# Altium PCB mergedPCBs.PcbDoc (part 1 of 4)
Units mil, origin at the board's own origin, x right, y up, seen from the top; angles counter-clockwise.
Board outline 7880 x 8510 mil, 2 copper layers (Top Layer, Bottom Layer); 381 components, 0 nets, 1142 pads, 205 vias.
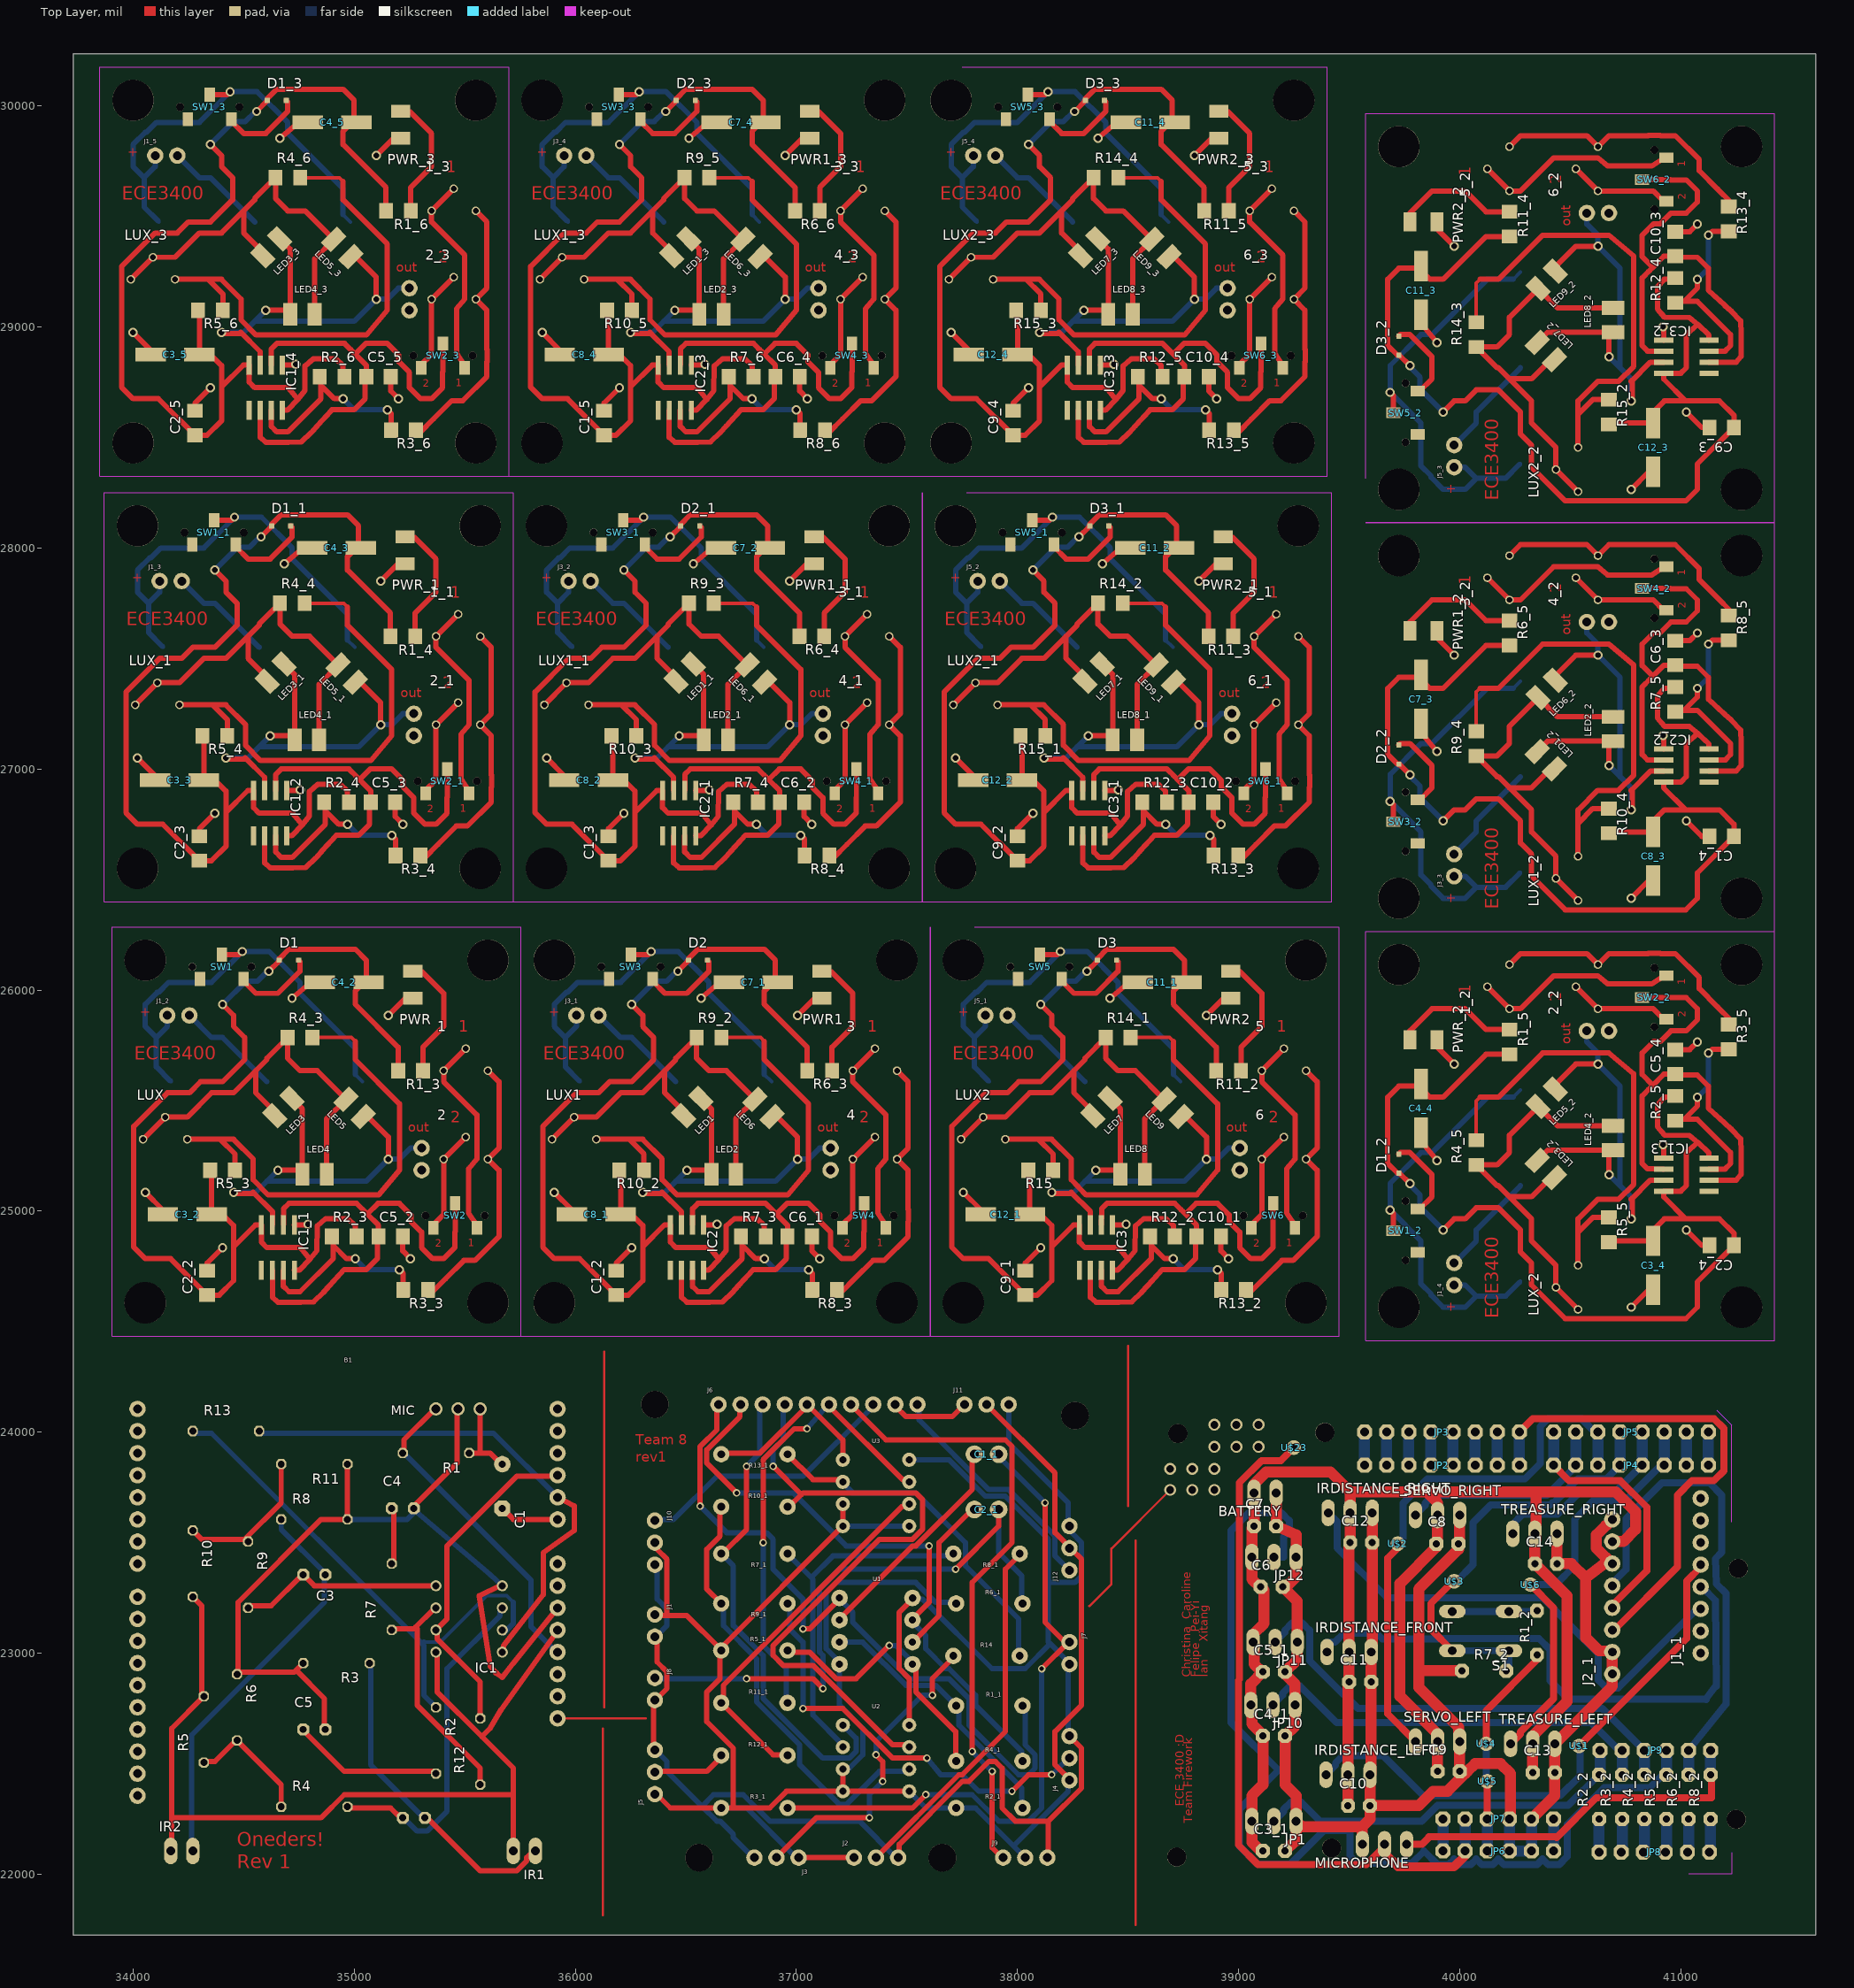
[diagram p0: Top Layer view]
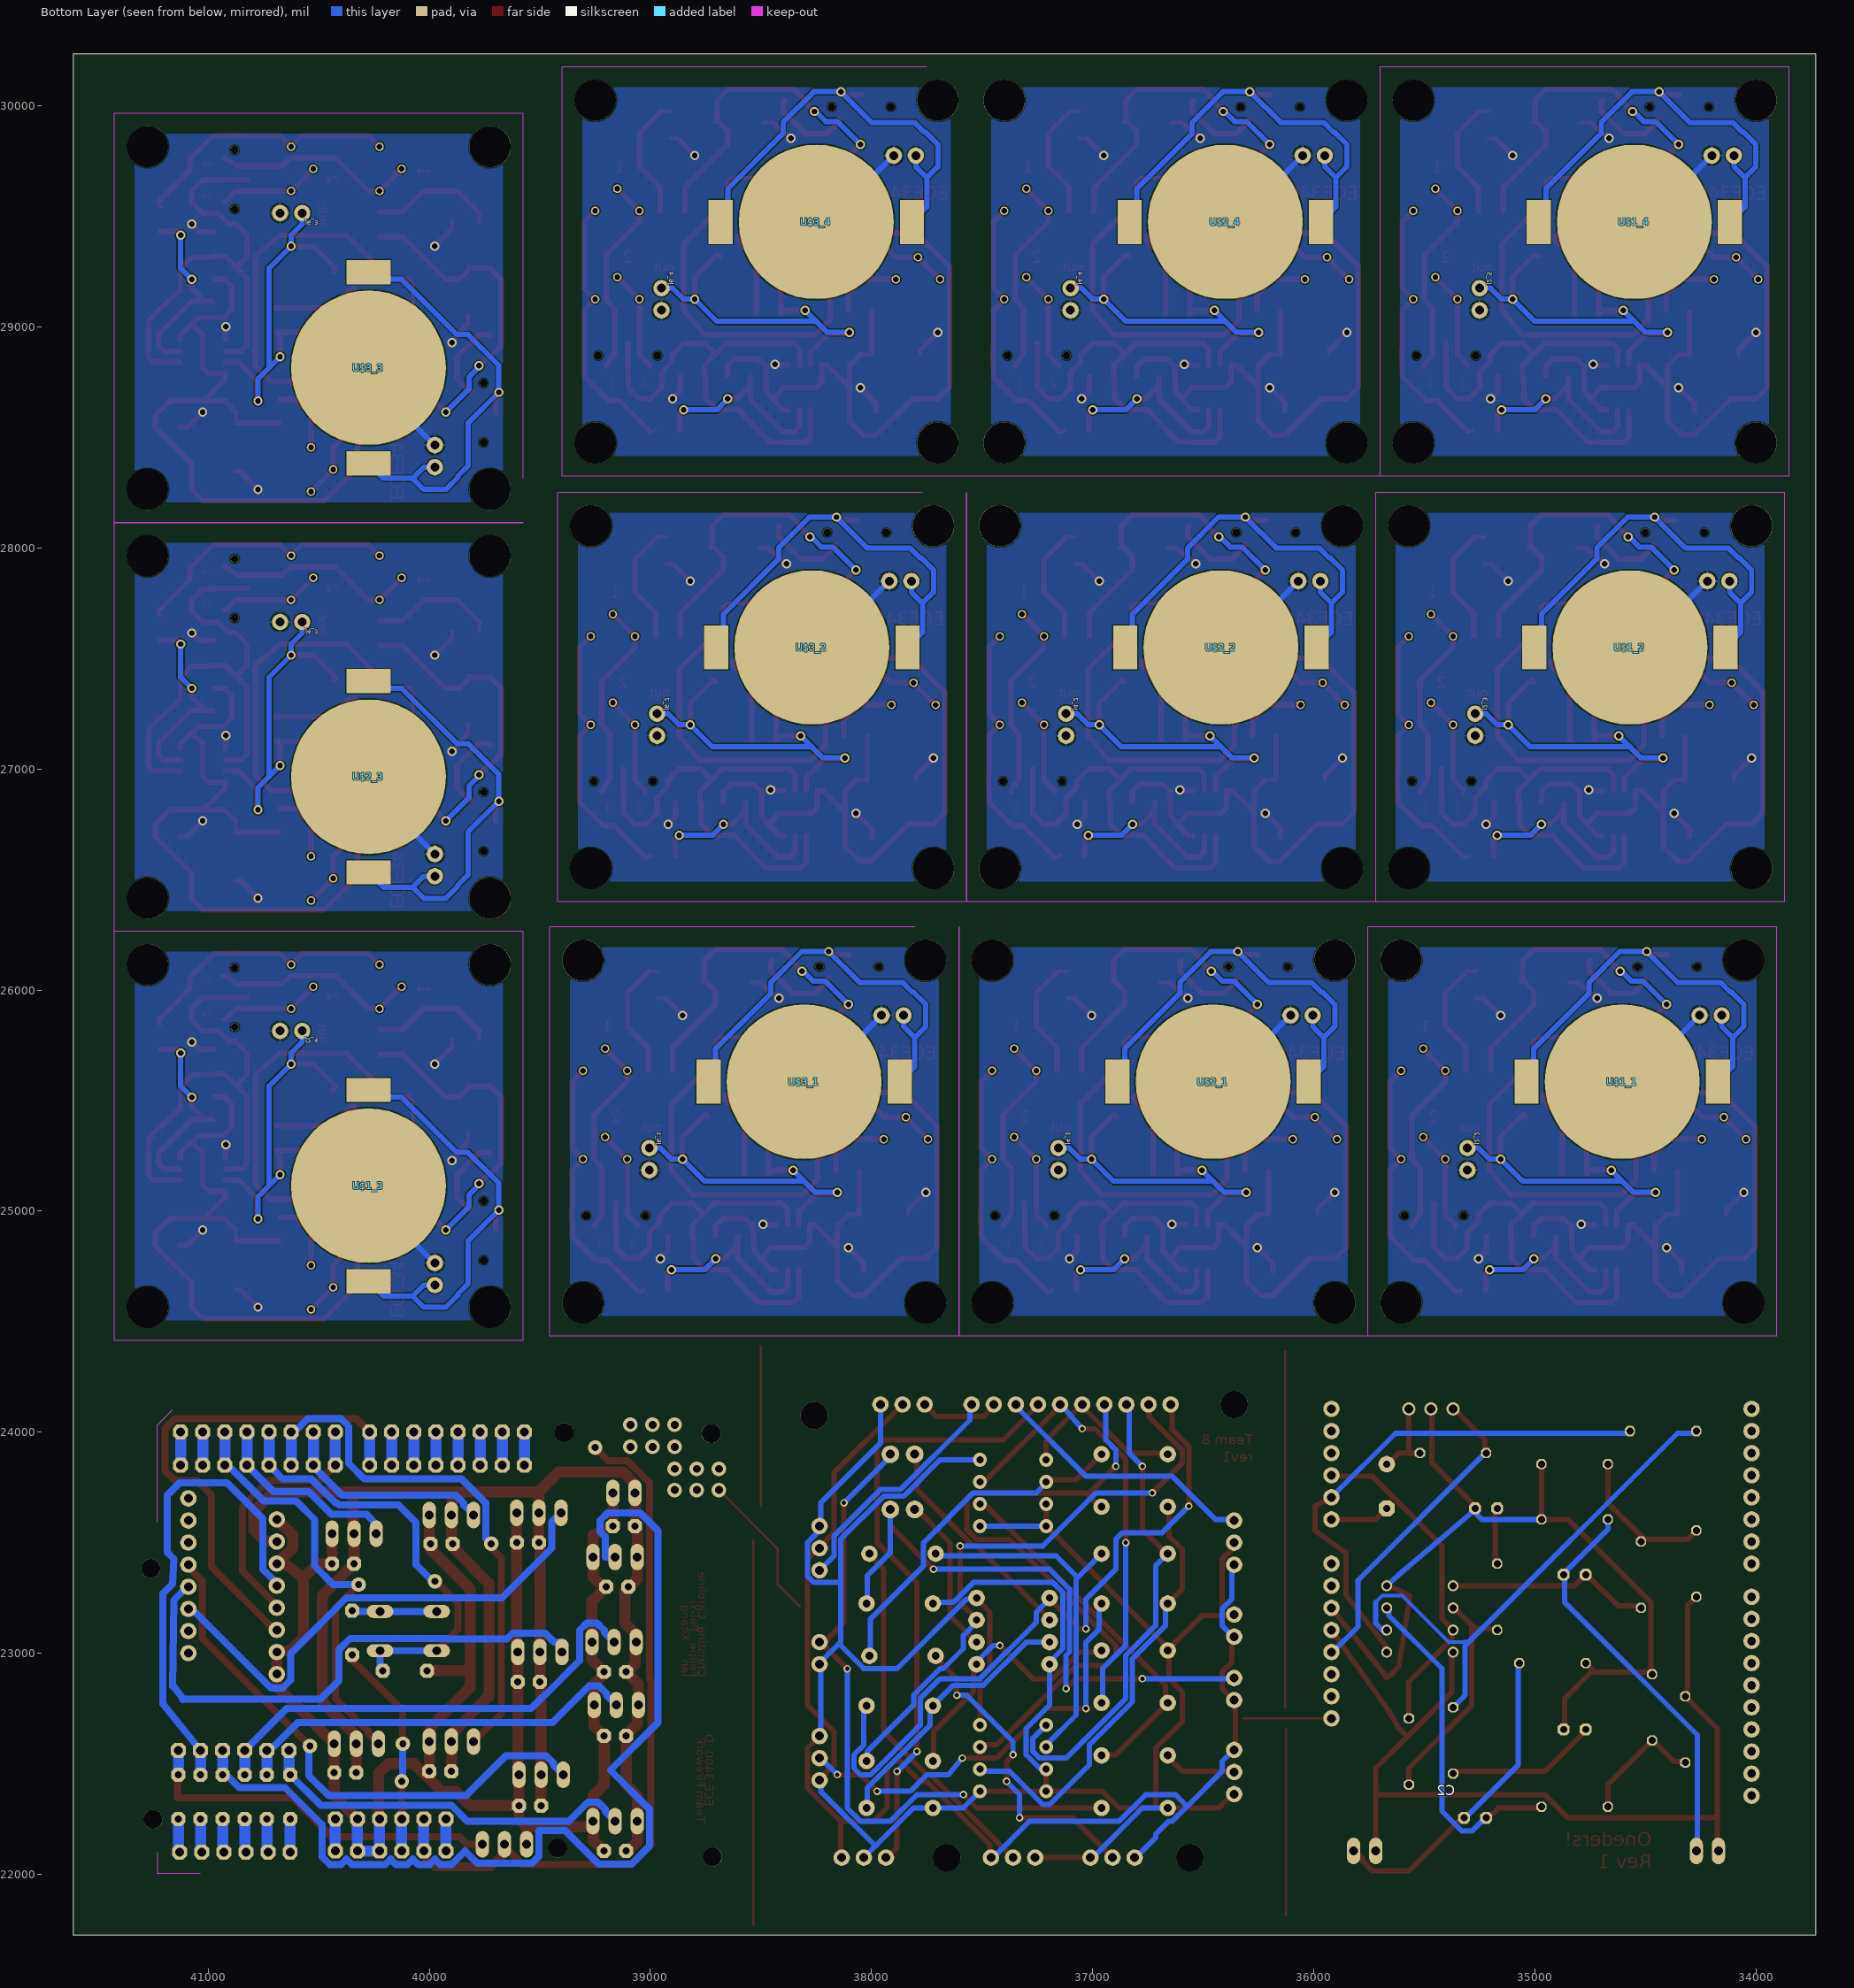
[diagram p1: Bottom Layer view, seen from below]

## Layer stack, top to bottom
Top Solder: solder mask 0.4, Solder Resist, Dk 3.5
Top Layer: signal copper 1.4
Dielectric 1: dielectric 12.6, FR-4, Dk 4.8
Bottom Layer: signal copper 1.4
Bottom Solder: solder mask 0.4, Solder Resist, Dk 3.5

## Board outline
33730,21725 41610,21725 41610,30235 33730,30235
cut-out: 41425,28115 41275,28115 39775,28115 39575,28115 39825,28115 41275,28115
cut-out: 37570,26400 37570,26550 37570,28050 37570,28250 37570,28000 37570,26550
cut-out: 37605,24435 37605,24585 37605,26085 37605,26285 37605,26035 37605,24585

## Design rules (kind name [scope] priority, off if disabled: settings)
Clearance [All] p1: gap=10 ignorepadtopadclearanceinfootprint=FALSE except(0: Arc-Hole Track-Hole SMDPad-Hole THPad-Hole Via-Hole Fill-Hole Poly-Hole Region-Hole Text-Hole)
PolygonConnect [All] p1: connectstyle=Relief reliefconductorwidth=10 reliefentries=4 polygonreliefangle="90 Angle" airgapwidth=10
RoutingVias [All] p1: holewidth=28 width=50 viastyle="Through Hole" minholewidth=28 minwidth=50 maxholewidth=28 maxwidth=50
SolderMaskExpansion [All] p1: expansion=4
Width [All] p1: maxlimit=10 minlimit=10 preferedwidth=10
30 further rules are at their usual default settings.

## Components (designator, comment, footprint, x,y, rotation, side; value= is the part's Value field where it differs from the comment)
1 "" POT 35505,25635 r0 top
1_1 "" POT 35470,27600 r0 top (schematic designator 1)
1_2 "" POT 40225,26015 r90 top (schematic designator 1)
1_3 "" POT 35450,29525 r0 top (schematic designator 1)
2 "" POT 35505,25235 r0 top
2_1 "" POT 35470,27200 r0 top (schematic designator 2)
2_2 "" POT 40625,26015 r90 top (schematic designator 2)
2_3 "" POT 35450,29125 r0 top (schematic designator 2)
3 "" POT 37355,25635 r0 top
3_1 "" POT 37320,27600 r0 top (schematic designator 3)
3_2 "" POT 40225,27865 r90 top (schematic designator 3)
3_3 "" POT 37300,29525 r0 top (schematic designator 3)
4 "" POT 37355,25235 r0 top
4_1 "" POT 37320,27200 r0 top (schematic designator 4)
4_2 "" POT 40625,27865 r90 top (schematic designator 4)
4_3 "" POT 37300,29125 r0 top (schematic designator 4)
5 "" POT 39205,25635 r0 top
5_1 "" POT 39170,27600 r0 top (schematic designator 5)
5_2 "" POT 40225,29715 r90 top (schematic designator 5)
5_3 "" POT 39150,29525 r0 top (schematic designator 5)
6 "" POT 39205,25235 r0 top
6_1 "" POT 39170,27200 r0 top (schematic designator 6)
6_2 "" POT 40625,29715 r90 top (schematic designator 6)
6_3 "" POT 39150,29125 r0 top (schematic designator 6)
B1 "ARDUINO_UNO_R3_SHIELDBASIC" UNO_R3_SHIELD 34970,23105 r0 top
BATTERY "" 1X02#1 39119.87,23725.22 r180 top
C1 "1uF" E5-6 35670,23755 r270 top
C1_1 "" CAP-PTH-SMALL-KIT 37860,23900 r180 top (schematic designator C1)
C1_2 "0.1uF" C1206 36185,24675 r90 top (schematic designator C1)
C1_3 "0.1uF" C1206 36150,26640 r90 top (schematic designator C1)
C1_4 "0.1uF" C1206 41185,26695 r180 top (schematic designator C1)
C1_5 "0.1uF" C1206 36130,28565 r90 top (schematic designator C1)
C2 "3.3 nF" C025-040X050 35270,22255 r180 bottom
C2_1 "" CAP-PTH-SMALL-KIT 37860,23650 r180 top (schematic designator C2)
C2_2 "0.1uF" C1206 34335,24675 r90 top (schematic designator C2)
C2_3 "0.1uF" C1206 34300,26640 r90 top (schematic designator C2)
C2_4 "0.1uF" C1206 41185,24845 r180 top (schematic designator C2)
C2_5 "0.1uF" C1206 34280,28565 r90 top (schematic designator C2)
C3 "3.3 nF" C025-040X050 34820,23355 r180 top
C3_1 "" C025-025X050 39159.87,22105.22 r0 top (schematic designator C3)
C3_2 "4.7uF" UD-6,6X6,6 34245,24985 r0 top (schematic designator C3)
C3_3 "4.7uF" UD-6,6X6,6 34210,26950 r0 top (schematic designator C3)
C3_4 "4.7uF" UD-6,6X6,6 40875,24755 r90 top (schematic designator C3)
C3_5 "4.7uF" UD-6,6X6,6 34190,28875 r0 top (schematic designator C3)
C4 "3.3 nF" C025-040X050 35220,23655 r0 top
C4_1 "" C025-025X050 39159.87,22625.22 r0 top (schematic designator C4)
C4_2 "47uF" UD-6,6X6,6 34955,26035 r0 top (schematic designator C4)
C4_3 "47uF" UD-6,6X6,6 34920,28000 r0 top (schematic designator C4)
C4_4 "47uF" UD-6,6X6,6 39825,25465 r90 top (schematic designator C4)
C4_5 "47uF" UD-6,6X6,6 34900,29925 r0 top (schematic designator C4)
C5 "3.3 nF" C025-040X050 34820,22655 r0 top
C5_1 "" C025-025X050 39159.87,22915.22 r0 top (schematic designator C5)
C5_2 "10nF" C1206 35165,24885 r0 top (schematic designator C5)
C5_3 "10nF" C1206 35130,26850 r0 top (schematic designator C5)
C5_4 "10nF" C1206 40975,25675 r90 top (schematic designator C5)
C5_5 "10nF" C1206 35110,28775 r0 top (schematic designator C5)
C6 "" C025-025X050 39149.87,23300.22 r0 top
C6_1 "10nF" C1206 37015,24885 r0 top (schematic designator C6)
C6_2 "10nF" C1206 36980,26850 r0 top (schematic designator C6)
C6_3 "10nF" C1206 40975,27525 r90 top (schematic designator C6)
C6_4 "10nF" C1206 36960,28775 r0 top (schematic designator C6)
C7 "" C025-025X050 39119.87,23575.22 r0 top
C7_1 "47uF" UD-6,6X6,6 36805,26035 r0 top (schematic designator C7)
C7_2 "47uF" UD-6,6X6,6 36770,28000 r0 top (schematic designator C7)
C7_3 "47uF" UD-6,6X6,6 39825,27315 r90 top (schematic designator C7)
C7_4 "47uF" UD-6,6X6,6 36750,29925 r0 top (schematic designator C7)
C8 "" C025-025X050 39944.87,23495.22 r0 top
C8_1 "4.7uF" UD-6,6X6,6 36095,24985 r0 top (schematic designator C8)
C8_2 "4.7uF" UD-6,6X6,6 36060,26950 r0 top (schematic designator C8)
C8_3 "4.7uF" UD-6,6X6,6 40875,26605 r90 top (schematic designator C8)
C8_4 "4.7uF" UD-6,6X6,6 36040,28875 r0 top (schematic designator C8)
C9 "" C025-025X050 39949.87,22465.22 r0 top
C9_1 "0.1uF" C1206 38035,24675 r90 top (schematic designator C9)
C9_2 "0.1uF" C1206 38000,26640 r90 top (schematic designator C9)
C9_3 "0.1uF" C1206 41185,28545 r180 top (schematic designator C9)
C9_4 "0.1uF" C1206 37980,28565 r90 top (schematic designator C9)
C10 "" C025-025X050 39544.87,22310.22 r0 top
C10_1 "10nF" C1206 38865,24885 r0 top (schematic designator C10)
C10_2 "10nF" C1206 38830,26850 r0 top (schematic designator C10)
C10_3 "10nF" C1206 40975,29375 r90 top (schematic designator C10)
C10_4 "10nF" C1206 38810,28775 r0 top (schematic designator C10)
C11 "" C025-025X050 39549.87,22870.22 r0 top
C11_1 "47uF" UD-6,6X6,6 38655,26035 r0 top (schematic designator C11)
C11_2 "47uF" UD-6,6X6,6 38620,28000 r0 top (schematic designator C11)
C11_3 "47uF" UD-6,6X6,6 39825,29165 r90 top (schematic designator C11)
C11_4 "47uF" UD-6,6X6,6 38600,29925 r0 top (schematic designator C11)
C12 "" C025-025X050 39554.87,23500.22 r0 top
C12_1 "4.7uF" UD-6,6X6,6 37945,24985 r0 top (schematic designator C12)
C12_2 "4.7uF" UD-6,6X6,6 37910,26950 r0 top (schematic designator C12)
C12_3 "4.7uF" UD-6,6X6,6 40875,28455 r90 top (schematic designator C12)
C12_4 "4.7uF" UD-6,6X6,6 37890,28875 r0 top (schematic designator C12)
C13 "" C025-025X050 40379.87,22460.22 r0 top
C14 "" C025-025X050 40389.87,23405.22 r0 top
D1 "" SOD323-R 34705,26135 r0 top
D1_1 "" SOD323-R 34670,28100 r0 top (schematic designator D1)
D1_2 "" SOD323-R 39725,25215 r90 top (schematic designator D1)
D1_3 "" SOD323-R 34650,30025 r0 top (schematic designator D1)
D2 "" SOD323-R 36555,26135 r0 top
D2_1 "" SOD323-R 36520,28100 r0 top (schematic designator D2)
D2_2 "" SOD323-R 39725,27065 r90 top (schematic designator D2)
D2_3 "" SOD323-R 36500,30025 r0 top (schematic designator D2)
D3 "" SOD323-R 38405,26135 r0 top
D3_1 "" SOD323-R 38370,28100 r0 top (schematic designator D3)
D3_2 "" SOD323-R 39725,28915 r90 top (schematic designator D3)
D3_3 "" SOD323-R 38350,30025 r0 top (schematic designator D3)
IC1 "LM358N" DIL08 35520,23155 r90 top
IC1_1 "LMC555" SO08 34655,24835 r180 top (schematic designator IC1)
IC1_2 "LMC555" SO08 34620,26800 r180 top (schematic designator IC1)
IC1_3 "LMC555" SO08 41025,25165 r270 top (schematic designator IC1)
IC1_4 "LMC555" SO08 34600,28725 r180 top (schematic designator IC1)
IC2 "LMC555" SO08 36505,24835 r180 top
IC2_1 "LMC555" SO08 36470,26800 r180 top (schematic designator IC2)
IC2_2 "LMC555" SO08 41025,27015 r270 top (schematic designator IC2)
IC2_3 "LMC555" SO08 36450,28725 r180 top (schematic designator IC2)
IC3 "LMC555" SO08 38355,24835 r180 top
IC3_1 "LMC555" SO08 38320,26800 r180 top (schematic designator IC3)
IC3_2 "LMC555" SO08 41025,28865 r270 top (schematic designator IC3)
IC3_3 "LMC555" SO08 38300,28725 r180 top (schematic designator IC3)
IR1 "" 1X02#1 35770,22105 r0 top
IR2 "" 1X02#1 34220,22105 r0 top
IRDISTANCE_FRONT "" 1X03#1 39499.87,23005.22 r0 top
IRDISTANCE_LEFT "" 1X03#1 39494.87,22450.22 r0 top
IRDISTANCE_RIGHT "" 1X03#1 39504.87,23635.22 r0 top
J1 "" 1X02#2 36360,23175 r270 top
J1_1 "" 1X08_ROUND 41089.87,23000.22 r90 top (schematic designator J1)
J1_2 "" 1X02#2 34155,25885 r0 top (schematic designator J1)
J1_3 "" 1X02#2 34120,27850 r0 top (schematic designator J1)
J1_4 "" 1X02#2 39975,24665 r90 top (schematic designator J1)
J1_5 "" 1X02#2 34100,29775 r0 top (schematic designator J1)
J2 "455-1750-1-ND" 1X03#2 37260,22075 r0 top
J2_1 "" 1X08_ROUND 40689.87,22905.22 r90 top (schematic designator J2)
J2_2 "" 1X02#2 35305,25285 r270 bottom (schematic designator J2)
J2_3 "" 1X02#2 35270,27250 r270 bottom (schematic designator J2)
J2_4 "" 1X02#2 40575,25815 r0 bottom (schematic designator J2)
J2_5 "" 1X02#2 35250,29175 r270 bottom (schematic designator J2)
J3 "455-1750-1-ND" 1X03#2 37010,22075 r180 top
J3_1 "" 1X02#2 36005,25885 r0 top (schematic designator J3)
J3_2 "" 1X02#2 35970,27850 r0 top (schematic designator J3)
J3_3 "" 1X02#2 39975,26515 r90 top (schematic designator J3)
J3_4 "" 1X02#2 35950,29775 r0 top (schematic designator J3)
J4 "455-1750-1-ND" 1X03#2 38235,22425 r90 top
J4_1 "" 1X02#2 37155,25285 r270 bottom (schematic designator J4)
J4_2 "" 1X02#2 37120,27250 r270 bottom (schematic designator J4)
J4_3 "" 1X02#2 40575,27665 r0 bottom (schematic designator J4)
J4_4 "" 1X02#2 37100,29175 r270 bottom (schematic designator J4)
J5 "455-1750-1-ND" 1X03#2 36360,22362.5 r90 top
J5_1 "" 1X02#2 37855,25885 r0 top (schematic designator J5)
J5_2 "" 1X02#2 37820,27850 r0 top (schematic designator J5)
J5_3 "" 1X02#2 39975,28365 r90 top (schematic designator J5)
J5_4 "" 1X02#2 37800,29775 r0 top (schematic designator J5)
J6 "" 1X10 36647.5,24125 r0 top
J6_1 "" 1X02#2 39005,25285 r270 bottom (schematic designator J6)
J6_2 "" 1X02#2 38970,27250 r270 bottom (schematic designator J6)
J6_3 "" 1X02#2 40575,29515 r0 bottom (schematic designator J6)
J6_4 "" 1X02#2 38950,29175 r270 bottom (schematic designator J6)
J7 "" 1X02#2 38235,23050 r270 top
J8 "" 1X02#2 36360,22887.5 r270 top
J9 "455-1750-1-ND" 1X03#2 37935,22075 r0 top
J10 "455-1750-1-ND" 1X03#2 36360,23600 r270 top
J11 "455-1750-1-ND" 1X03#2 37760,24125 r0 top
J12 "455-1750-1-ND" 1X03#2 38235,23375 r90 top
JP1 "" 1X03#1 39159.87,22240.22 r180 top
JP2 "" 1X08-BIG 39919.87,23850.22 r0 top
JP3 "" 1X08-CLEANBIG 39919.87,24000.22 r0 top
JP4 "" 1X08-BIG 40774.87,23850.22 r180 top
JP5 "" 1X08-CLEANBIG 40774.87,24000.22 r180 top
JP6 "" 1X06-CLEANBIG 40174.87,22105.22 r180 top
JP7 "" 1X06-BIG 40174.87,22250.22 r180 top
JP8 "" 1X06-CLEANBIG 40879.87,22100.22 r0 top
JP9 "" 1X06-BIG 40884.87,22560.22 r0 top
JP10 "" 1X03#1 39154.87,22765.22 r180 top
JP11 "" 1X03#1 39164.87,23050.22 r180 top
JP12 "" 1X03#1 39159.87,23435.22 r180 top
LED1 "" 2-SMD 36530,25470 r225 top
LED1_1 "" 2-SMD 36495,27435 r225 top (schematic designator LED1)
LED1_2 "" 2-SMD 40390,27040 r315 top (schematic designator LED1)
LED1_3 "" 2-SMD 36475,29360 r225 top (schematic designator LED1)
LED2 "" 2-SMD 36670.86,25167.07 r0 top
LED2_1 "" 2-SMD 36635.86,27132.07 r0 top (schematic designator LED2)
LED2_2 "" 2-SMD 40692.93,27180.86 r90 top (schematic designator LED2)
LED2_3 "" 2-SMD 36615.86,29057.07 r0 top (schematic designator LED2)
LED3 "" 2-SMD 34680,25470 r225 top
LED3_1 "" 2-SMD 34645,27435 r225 top (schematic designator LED3)
LED3_2 "" 2-SMD 40390,25190 r315 top (schematic designator LED3)
LED3_3 "" 2-SMD 34625,29360 r225 top (schematic designator LED3)
LED4 "" 2-SMD 34820.86,25167.07 r0 top
LED4_1 "" 2-SMD 34785.86,27132.07 r0 top (schematic designator LED4)
LED4_2 "" 2-SMD 40692.93,25330.86 r90 top (schematic designator LED4)
LED4_3 "" 2-SMD 34765.86,29057.07 r0 top (schematic designator LED4)
LED5 "" 2-SMD 35002.07,25466.21 r135 top
LED5_1 "" 2-SMD 34967.07,27431.21 r135 top (schematic designator LED5)
LED5_2 "" 2-SMD 40393.79,25512.07 r225 top (schematic designator LED5)
LED5_3 "" 2-SMD 34947.07,29356.21 r135 top (schematic designator LED5)
LED6 "" 2-SMD 36852.07,25466.21 r135 top
LED6_1 "" 2-SMD 36817.07,27431.21 r135 top (schematic designator LED6)
LED6_2 "" 2-SMD 40393.79,27362.07 r225 top (schematic designator LED6)
LED6_3 "" 2-SMD 36797.07,29356.21 r135 top (schematic designator LED6)
LED7 "" 2-SMD 38380,25470 r225 top
LED7_1 "" 2-SMD 38345,27435 r225 top (schematic designator LED7)
LED7_2 "" 2-SMD 40390,28890 r315 top (schematic designator LED7)
LED7_3 "" 2-SMD 38325,29360 r225 top (schematic designator LED7)
LED8 "" 2-SMD 38520.86,25167.07 r0 top
LED8_1 "" 2-SMD 38485.86,27132.07 r0 top (schematic designator LED8)
LED8_2 "" 2-SMD 40692.93,29030.86 r90 top (schematic designator LED8)
LED8_3 "" 2-SMD 38465.86,29057.07 r0 top (schematic designator LED8)
LED9 "" 2-SMD 38702.07,25466.21 r135 top
LED9_1 "" 2-SMD 38667.07,27431.21 r135 top (schematic designator LED9)
LED9_2 "" 2-SMD 40393.79,29212.07 r225 top (schematic designator LED9)
LED9_3 "" 2-SMD 38647.07,29356.21 r135 top (schematic designator LED9)
LUX "" POT 34145,25325 r0 top
LUX1 "" POT 35995,25325 r0 top
LUX1_1 "" POT 35960,27290 r0 top (schematic designator LUX1)
LUX1_2 "" POT 40535,26505 r90 top (schematic designator LUX1)
LUX1_3 "" POT 35940,29215 r0 top (schematic designator LUX1)
LUX2 "" POT 37845,25325 r0 top
LUX2_1 "" POT 37810,27290 r0 top (schematic designator LUX2)
LUX2_2 "" POT 40535,28355 r90 top (schematic designator LUX2)
LUX2_3 "" POT 37790,29215 r0 top (schematic designator LUX2)
LUX_1 "" POT 34110,27290 r0 top (schematic designator LUX)
LUX_2 "" POT 40535,24655 r90 top (schematic designator LUX)
LUX_3 "" POT 34090,29215 r0 top (schematic designator LUX)
MIC "" 1X03#3 35470,24105 r0 top
MICROPHONE "" 1X03#1 39659.87,22135.22 r180 top
PWR "" 2-PLCC 35265.24,26023.98 r90 top
PWR1 "" 2-PLCC 37115.24,26023.98 r90 top
PWR1_1 "" 2-PLCC 37080.24,27988.98 r90 top (schematic designator PWR1)
PWR1_2 "" 2-PLCC 39836.02,27625.24 r180 top (schematic designator PWR1)
PWR1_3 "" 2-PLCC 37060.24,29913.98 r90 top (schematic designator PWR1)
PWR2 "" 2-PLCC 38965.24,26023.98 r90 top
PWR2_1 "" 2-PLCC 38930.24,27988.98 r90 top (schematic designator PWR2)
PWR2_2 "" 2-PLCC 39836.02,29475.24 r180 top (schematic designator PWR2)
PWR2_3 "" 2-PLCC 38910.24,29913.98 r90 top (schematic designator PWR2)
PWR_1 "" 2-PLCC 35230.24,27988.98 r90 top (schematic designator PWR)
PWR_2 "" 2-PLCC 39836.02,25775.24 r180 top (schematic designator PWR)
PWR_3 "" 2-PLCC 35210.24,29913.98 r90 top (schematic designator PWR)
R1 "2.2k" 0207/7 35370,23905 r180 top
R1_1 "22k" AXIAL-0.3 37872.5,22762.5 r0 top (schematic designator R1)
R1_2 "300" 0207/5V 40349.47,23092.02 r90 top (schematic designator R1)
R1_3 "330" R1206 35255,25635 r180 top (schematic designator R1)
R1_4 "330" R1206 35220,27600 r180 top (schematic designator R1)
R1_5 "330" R1206 40225,25765 r270 top (schematic designator R1)
R1_6 "330" R1206 35200,29525 r180 top (schematic designator R1)
R2 "1k" 0207/7 35370,22605 r270 top
R2_1 "1k" AXIAL-0.3 37872.5,22300 r0 top (schematic designator R2)
R2_2 "300" 0207/5V 40629.87,22350.22 r90 top (schematic designator R2)
R2_3 "470" R1206 34955,24885 r0 top (schematic designator R2)
R2_4 "470" R1206 34920,26850 r0 top (schematic designator R2)
R2_5 "470" R1206 40975,25465 r90 top (schematic designator R2)
R2_6 "470" R1206 34900,28775 r0 top (schematic designator R2)
R3 "1.8k" 0207/7 34920,22955 r180 top
R3_1 "2k" AXIAL-0.3 36810,22300 r0 top (schematic designator R3)
R3_2 "300" 0207/5V 40734.87,22350.22 r90 top (schematic designator R3)
R3_3 "1.2k" R1206 35278,24643 r180 top (schematic designator R3)
R3_4 "1.2k" R1206 35243,26608 r180 top (schematic designator R3)
R3_5 "1.2k" R1206 41217,25788 r270 top (schematic designator R3)
R3_6 "1.2k" R1206 35223,28533 r180 top (schematic designator R3)
R4 "8k" 0207/7 34820,22305 r0 top
R4_1 "22k" AXIAL-0.3 37872.5,22512.5 r0 top (schematic designator R4)
R4_2 "300" 0207/5V 40834.87,22350.22 r90 top (schematic designator R4)
R4_3 "280" R1206 34755,25785 r0 top (schematic designator R4)
R4_4 "280" R1206 34720,27750 r0 top (schematic designator R4)
R4_5 "280" R1206 40075,25265 r90 top (schematic designator R4)
R4_6 "280" R1206 34700,29675 r0 top (schematic designator R4)
R5 "100k" 0207/7 34320,22655 r90 top
R5_1 "1k" AXIAL-0.3 36810,23012.5 r0 top (schematic designator R5)
R5_2 "300" 0207/5V 40934.87,22350.22 r90 top (schematic designator R5)
R5_3 "47" R1206 34405,25185 r180 top (schematic designator R5)
R5_4 "47" R1206 34370,27150 r180 top (schematic designator R5)
R5_5 "47" R1206 40675,24915 r270 top (schematic designator R5)
R5_6 "47" R1206 34350,29075 r180 top (schematic designator R5)
R6 "100k" 0207/7 34470,22755 r270 top
R6_1 "2k" AXIAL-0.3 37872.5,23225 r0 top (schematic designator R6)
R6_2 "300" 0207/5V 41034.87,22350.22 r90 top (schematic designator R6)
R6_3 "330" R1206 37105,25635 r180 top (schematic designator R6)
R6_4 "330" R1206 37070,27600 r180 top (schematic designator R6)
R6_5 "330" R1206 40225,27615 r270 top (schematic designator R6)
R6_6 "330" R1206 37050,29525 r180 top (schematic designator R6)
R7 "1k" 0207/7 35170,23255 r90 top
R7_1 "" AXIAL-0.3 36810,23450 r180 top (schematic designator R7)
R7_2 "10k" 0207/5V 40109.87,22920.22 r0 top (schematic designator R7)
R7_3 "470" R1206 36805,24885 r0 top (schematic designator R7)
R7_4 "470" R1206 36770,26850 r0 top (schematic designator R7)
R7_5 "470" R1206 40975,27315 r90 top (schematic designator R7)
R7_6 "470" R1206 36750,28775 r0 top (schematic designator R7)
R8 "1.8k" 0207/7 34820,23605 r0 top
R8_1 "" AXIAL-0.3 37860,23450 r180 top (schematic designator R8)
R8_2 "300" 0207/5V 41134.87,22350.22 r90 top (schematic designator R8)
R8_3 "1.2k" R1206 37128,24643 r180 top (schematic designator R8)
R8_4 "1.2k" R1206 37093,26608 r180 top (schematic designator R8)
R8_5 "1.2k" R1206 41217,27638 r270 top (schematic designator R8)
R8_6 "1.2k" R1206 37073,28533 r180 top (schematic designator R8)
R9 "8k" 0207/7 34520,23355 r270 top
R9_1 "" AXIAL-0.3 36810,23225 r180 top (schematic designator R9)
R9_2 "280" R1206 36605,25785 r0 top (schematic designator R9)
R9_3 "280" R1206 36570,27750 r0 top (schematic designator R9)
R9_4 "280" R1206 40075,27115 r90 top (schematic designator R9)
R9_5 "280" R1206 36550,29675 r0 top (schematic designator R9)
R10 "100k" 0207/7 34270,23405 r270 top
R10_1 "" AXIAL-0.3 36810,23662.5 r0 top (schematic designator R10)
R10_2 "47" R1206 36255,25185 r180 top (schematic designator R10)
R10_3 "47" R1206 36220,27150 r180 top (schematic designator R10)
R10_4 "47" R1206 40675,26765 r270 top (schematic designator R10)
R10_5 "47" R1206 36200,29075 r180 top (schematic designator R10)
R11 "100k" 0207/7 34820,23855 r180 top
R11_1 "" AXIAL-0.3 36810,22775 r0 top (schematic designator R11)
R11_2 "330" R1206 38955,25635 r180 top (schematic designator R11)
R11_3 "330" R1206 38920,27600 r180 top (schematic designator R11)
R11_4 "330" R1206 40225,29465 r270 top (schematic designator R11)
R11_5 "330" R1206 38900,29525 r180 top (schematic designator R11)
R12 "5M" 0207/7 35570,22555 r90 top
R12_1 "" AXIAL-0.3 36810,22537.5 r0 top (schematic designator R12)
R12_2 "470" R1206 38655,24885 r0 top (schematic designator R12)
R12_3 "470" R1206 38620,26850 r0 top (schematic designator R12)
R12_4 "470" R1206 40975,29165 r90 top (schematic designator R12)
R12_5 "470" R1206 38600,28775 r0 top (schematic designator R12)
R13 "5M" 0207/7 34420,24005 r0 top
R13_1 "" AXIAL-0.3 36810,23900 r180 top (schematic designator R13)
R13_2 "1.2k" R1206 38978,24643 r180 top (schematic designator R13)
R13_3 "1.2k" R1206 38943,26608 r180 top (schematic designator R13)
R13_4 "1.2k" R1206 41217,29488 r270 top (schematic designator R13)
R13_5 "1.2k" R1206 38923,28533 r180 top (schematic designator R13)
R14 "" AXIAL-0.3 37860,22987.5 r0 top
R14_1 "280" R1206 38455,25785 r0 top (schematic designator R14)
R14_2 "280" R1206 38420,27750 r0 top (schematic designator R14)
R14_3 "280" R1206 40075,28965 r90 top (schematic designator R14)
R14_4 "280" R1206 38400,29675 r0 top (schematic designator R14)
R15 "47" R1206 38105,25185 r180 top
R15_1 "47" R1206 38070,27150 r180 top (schematic designator R15)
R15_2 "47" R1206 40675,28615 r270 top (schematic designator R15)
R15_3 "47" R1206 38050,29075 r180 top (schematic designator R15)
S1 "Button" B3F-10XX 40094.87,23100.22 r180 top
SERVO_LEFT "" 1X03#1 39899.87,22600.22 r0 top
SERVO_RIGHT "" 1X03#1 39899.87,23625.22 r0 top
SW1 "" CL-SB-12A 34401.57,26104.88 r0 top
SW1_1 "" CL-SB-12A 34366.57,28069.88 r0 top (schematic designator SW1)
SW1_2 "" CL-SB-12A 39755.12,24911.57 r90 top (schematic designator SW1)
SW1_3 "" CL-SB-12A 34346.57,29994.88 r0 top (schematic designator SW1)
SW2 "" CL-SB-12A 35456.57,24979.88 r0 top
SW2_1 "" CL-SB-12A 35421.57,26944.88 r0 top (schematic designator SW2)
SW2_2 "" CL-SB-12A 40880.12,25966.57 r90 top (schematic designator SW2)
SW2_3 "" CL-SB-12A 35401.57,28869.88 r0 top (schematic designator SW2)
SW3 "" CL-SB-12A 36251.57,26104.88 r0 top
SW3_1 "" CL-SB-12A 36216.57,28069.88 r0 top (schematic designator SW3)
SW3_2 "" CL-SB-12A 39755.12,26761.57 r90 top (schematic designator SW3)
SW3_3 "" CL-SB-12A 36196.57,29994.88 r0 top (schematic designator SW3)
SW4 "" CL-SB-12A 37306.57,24979.88 r0 top
SW4_1 "" CL-SB-12A 37271.57,26944.88 r0 top (schematic designator SW4)
SW4_2 "" CL-SB-12A 40880.12,27816.57 r90 top (schematic designator SW4)
SW4_3 "" CL-SB-12A 37251.57,28869.88 r0 top (schematic designator SW4)
SW5 "" CL-SB-12A 38101.57,26104.88 r0 top
SW5_1 "" CL-SB-12A 38066.57,28069.88 r0 top (schematic designator SW5)
SW5_2 "" CL-SB-12A 39755.12,28611.57 r90 top (schematic designator SW5)
SW5_3 "" CL-SB-12A 38046.57,29994.88 r0 top (schematic designator SW5)
SW6 "" CL-SB-12A 39156.57,24979.88 r0 top
SW6_1 "" CL-SB-12A 39121.57,26944.88 r0 top (schematic designator SW6)
SW6_2 "" CL-SB-12A 40880.12,29666.57 r90 top (schematic designator SW6)
SW6_3 "" CL-SB-12A 39101.57,28869.88 r0 top (schematic designator SW6)
TREASURE_LEFT "" 1X03#1 40329.87,22590.22 r0 top
TREASURE_RIGHT "" 1X03#1 40339.87,23540.22 r0 top
U1 "LM358" DIP08-KIT 37360,23100 r270 top
U2 "LM358" DIP08 37360,22525 r270 top
U3 "LM358" DIP08 37360,23725 r270 top
U$1 "" PERFHOLE 40539.87,22580.22 r0 top
U$1_1 "" COINCELL 34605,25585 r0 bottom (schematic designator U$1)
U$1_2 "" COINCELL 34570,27550 r0 bottom (schematic designator U$1)
U$1_3 "" COINCELL 40275,25115 r90 bottom (schematic designator U$1)
U$1_4 "" COINCELL 34550,29475 r0 bottom (schematic designator U$1)
U$2 "" PERFHOLE 39719.87,23495.22 r0 top
U$2_1 "" COINCELL 36455,25585 r0 bottom (schematic designator U$2)
U$2_2 "" COINCELL 36420,27550 r0 bottom (schematic designator U$2)
U$2_3 "" COINCELL 40275,26965 r90 bottom (schematic designator U$2)
U$2_4 "" COINCELL 36400,29475 r0 bottom (schematic designator U$2)
U$3 "" PERFHOLE 39974.87,23325.22 r0 top
U$3_1 "" COINCELL 38305,25585 r0 bottom (schematic designator U$3)
U$3_2 "" COINCELL 38270,27550 r0 bottom (schematic designator U$3)
U$3_3 "" COINCELL 40275,28815 r90 bottom (schematic designator U$3)
U$3_4 "" COINCELL 38250,29475 r0 bottom (schematic designator U$3)
U$4 "" PERFHOLE 40119.87,22590.22 r0 top
U$5 "" PERFHOLE 40124.87,22420.22 r0 top
U$6 "" PERFHOLE 40319.87,23310.22 r0 top
U$23 "" PERFHOLE 39249.87,23930.22 r0 top

## Footprints (in the part's own frame and the unit in brackets; to place one, negate y for a bottom-side part, rotate by r counter-clockwise, add the part's x,y. Pads: shape width x height; smd on the part's side, far side on the other; paste and mask are expansions set on the pad)
1X02#1 [mil] "1X02"
  oval 60x120 hole 40: 1(-50,0) 2(50,0)
1X02#2 [mil] "1X02"
  round 74 hole 40: 1(0,0) 2(100,0)
1X03#1 [mil] "1X03"
  oval 60x120 hole 40: 1(-100,0) 2(0,0) 3(100,0)
1X03#2 [mil] "1X03"
  round 74 hole 40: 1(0,0) 2(100,0) 3(200,0)
1X03#3 [mil] "1X03"
  round 60 hole 40: 1(-100,0) 2(0,0) 3(100,0)
1X06-BIG [mil] "1X06-BIG"
  oct 67.78x67.78 hole 40: 1(-250,0) 2(-150,0) 3(-50,0) 4(50,0) 5(150,0) 6(250,0)
1X06-CLEANBIG [mil] "1X06-CLEANBIG"
  oct 67.78x67.78 hole 40: 1(-250,0) 2(-150,0) 3(-50,0) 4(50,0) 5(150,0) 6(250,0)
1X08-BIG [mil] "1X08-BIG"
  oct 67.78x67.78 hole 40: 1(-350,0) 2(-250,0) 3(-150,0) 4(-50,0) 5(50,0) 6(150,0) 7(250,0) 8(350,0)
1X08-CLEANBIG [mil] "1X08-CLEANBIG"
  oct 67.78x67.78 hole 40: 1(-350,0) 2(-250,0) 3(-150,0) 4(-50,0) 5(50,0) 6(150,0) 7(250,0) 8(350,0)
1X08_ROUND [mil] "1X08_ROUND"
  round 74 hole 40: 1(0,0) 2(100,0) 3(200,0) 4(300,0) 5(400,0) 6(500,0) 7(600,0) 8(700,0)
1X10 [mil] "1X10"
  round 74 hole 40: 1(0,0) 2(100,0) 3(200,0) 4(300,0) 5(400,0) 6(500,0) 7(600,0) 8(700,0) 9(800,0) 10(900,0)
2-PLCC [mil] "2-PLCC"
  rect 59.06x86.61 smd: P$1(61.02,0) P$2(-61.02,0)
2-SMD [mil] "2-SMD"
  rect 62.99x102.36 smd: P$1(55.12,0) P$2(-55.12,0)
0207/5V [mil] "0207/5V"
  oct 63.9x63.9 hole 32: 1(-100,0) 2(100,0)
0207/7 [mil] "0207/7"
  oct 46.48x46.48 hole 32: 1(-150,0) 2(150,0)
AXIAL-0.3 [mil] "AXIAL-0.3"
  round 74 hole 35.43: P$1(-150,0) P$2(150,0)
B3F-10XX [mil] "B3F-10XX"
  oval 120x60 hole 40: 1(-128,89) 2(128,89) 3(-128,-89) 4(128,-89)
C025-025X050 [mil] "C025-025X050"
  oct 63.9x63.9 hole 32: 1(-50,0) 2(50,0)
C025-040X050 [mil] "C025-040X050"
  oct 54.22x54.22 hole 32: 1(-50,0) 2(50,0)
C1206 [mil] "C1206"
  rect 62.99x70.87 smd: 1(-55.12,0) 2(55.12,0)
CAP-PTH-SMALL-KIT [mil] "CAP-PTH-SMALL-KIT"
  round 80 hole 40: 1(-55,0) 2(55,0)
CL-SB-12A [mil] "CL-SB-12A"
  round 35.43 hole 35.43: 1(-133.86,0) 1(133.86,0)
  rect 47.24x62.99 smd: 1(0,55.12) 2(98.43,-55.12) 3(-98.43,-55.12)
COINCELL [mil] "COINCELL"
  rect 109.84x200 smd: +@1(-432.68,0) +@2(432.68,0)
  rrect100% 700x700 smd: -(0,0)
DIL08 [mil] "DIL08"
  round 50 hole 32: 1(-150,-150) 2(-50,-150) 3(50,-150) 4(150,-150) 5(150,150) 6(50,150) 7(-50,150) 8(-150,150)
DIP08 [mil] "DIP08"
  round 64 hole 32: 1(-150,-150) 2(-50,-150) 3(50,-150) 4(150,-150) 5(150,150) 6(50,150) 7(-50,150) 8(-150,150)
DIP08-KIT [mil] "DIP08-KIT"
  round 75 hole 32: 1(-150,-165) 2(-50,-165) 3(50,-165) 4(150,-165) 5(150,165) 6(50,165) 7(-50,165)
  round 75 hole 34: 8(-150,165)
E5-6 [mil] "E5-6"
  round 75 hole 32: +(-100,0)
  oct 72.62x72.62 hole 32: -(100,0)
PERFHOLE [mil] "PERFHOLE"
  round 66 hole 31.5: P$1(0,0)
POT [mm] "POT"
  round 0.975 hole 0.65: P$1(-2.54,0) P$2(0,2.54) P$3(2.54,0)
R1206 [mil] "R1206"
  rect 62.99x70.98 smd: 1(-55.98,0) 2(55.98,0)
SO08 [mil] "SO08"
  rect 23.62x86.61 smd: 1(-75,-102.36) 2(-25,-102.36) 3(25,-102.36) 4(75,-102.36) 5(75,102.36) 6(25,102.36) 7(-25,102.36) 8(-75,102.36)
SOD323-R [mil] "SOD323-R"
  rect 23.62x23.62 smd: A(43.31,0) C(-43.31,0)
UD-6,6X6,6 [mil] "UD-6,6X6,6"
  rect 137.8x62.99 smd: +(110.24,0) -(-110.24,0)
UNO_R3_SHIELD [mil] "UNO_R3_SHIELD"
  round 74 hole 40: 3.3V(950,-100) 5V(950,0) A0(950,500) A1(950,600) A2(950,700) A3(950,800) A4(950,900) A5(950,1000) AREF(-950,-550) D2(-950,800) D3(-950,700) D4(-950,600) D5(-950,500) D6(-950,400) D7(-950,300) D8(-950,150) D9(-950,50) D10(-950,-50) D11(-950,-150) D12(-950,-250) D13(-950,-350) GND@0(950,100) GND@1(950,200) GND@2(-950,-450) IOREF(950,-300) NC(950,-400) RES(950,-200) RX(-950,1000) SCL(-950,-750) SDA(-950,-650) TX(-950,900) VIN(950,300)

## Part data
1 1_1 1_2 1_3 2 2_1 2_2 2_3 3 3_1 3_2 3_3 4 4_1 4_2 4_3 5 5_1 5_2 5_3 6 6_1 6_2 6_3 LUX LUX1 LUX1_1 LUX1_2 LUX1_3 LUX2 LUX2_1 LUX2_2 LUX2_3 LUX_1 LUX_2 LUX_3: library part POT
B1: library part UNO_R3_SHIELD
BATTERY IR1 IR2 J1 J1_2 J1_3 J1_4 J1_5 J2_2 J2_3 J2_4 J2_5 J3_1 J3_2 J3_3 J3_4 J4_1 J4_2 J4_3 J4_4 J5_1 J5_2 J5_3 J5_4 J6_1 J6_2 J6_3 J6_4 J7 J8: library part 1X02
C1: library part E5-6
C1_1 C2_1: library part CAP-PTH-SMALL-KIT
C1_2 C1_3 C1_4 C1_5 C2_2 C2_3 C2_4 C2_5 C5_2 C5_3 C5_4 C5_5 C6_1 C6_2 C6_3 C6_4 C9_1 C9_2 C9_3 C9_4 C10_1 C10_2 C10_3 C10_4: library part C1206
C2 C3 C4 C5: library part C025-040X050
C3_1 C4_1 C5_1 C6 C7 C8 C9 C10 C11 C12 C13 C14: library part C025-025X050
C3_2 C3_3 C3_4 C3_5 C4_2 C4_3 C4_4 C4_5 C7_1 C7_2 C7_3 C7_4 C8_1 C8_2 C8_3 C8_4 C11_1 C11_2 C11_3 C11_4 C12_1 C12_2 C12_3 C12_4: library part UD-6,6X6,6
D1 D1_1 D1_2 D1_3 D2 D2_1 D2_2 D2_3 D3 D3_1 D3_2 D3_3: library part SOD323-R
IC1: library part DIL08
IC1_1 IC1_2 IC1_3 IC1_4 IC2 IC2_1 IC2_2 IC2_3 IC3 IC3_1 IC3_2 IC3_3: library part SO08
IRDISTANCE_FRONT IRDISTANCE_LEFT IRDISTANCE_RIGHT J2 J3 J4 J5 J9 J10 J11 J12 JP1 JP10 JP11 JP12 MIC MICROPHONE SERVO_LEFT SERVO_RIGHT TREASURE_LEFT TREASURE_RIGHT: library part 1X03
J1_1 J2_1: library part 1X08_ROUND
J6: library part 1X10
JP2 JP4: library part 1X08-BIG
JP3 JP5: library part 1X08-CLEANBIG
JP6 JP8: library part 1X06-CLEANBIG
JP7 JP9: library part 1X06-BIG
LED1 LED1_1 LED1_2 LED1_3 LED2 LED2_1 LED2_2 LED2_3 LED3 LED3_1 LED3_2 LED3_3 LED4 LED4_1 LED4_2 LED4_3 LED5 LED5_1 LED5_2 LED5_3 LED6 LED6_1 LED6_2 LED6_3 LED7 LED7_1 LED7_2 LED7_3 LED8 LED8_1 LED8_2 LED8_3 LED9 LED9_1 LED9_2 LED9_3: library part 2-SMD
PWR PWR1 PWR1_1 PWR1_2 PWR1_3 PWR2 PWR2_1 PWR2_2 PWR2_3 PWR_1 PWR_2 PWR_3: library part 2-PLCC
R1 R2 R3 R4 R5 R6 R7 R8 R9 R10 R11 R12 R13: library part 0207/7
R1_1 R2_1 R3_1 R4_1 R5_1 R6_1 R7_1 R8_1 R9_1 R10_1 R11_1 R12_1 R13_1 R14: library part AXIAL-0.3
R1_2 R2_2 R3_2 R4_2 R5_2 R6_2 R7_2 R8_2: library part 0207/5V
R1_3 R1_4 R1_5 R1_6 R2_3 R2_4 R2_5 R2_6 R3_3 R3_4 R3_5 R3_6 R4_3 R4_4 R4_5 R4_6 R5_3 R5_4 R5_5 R5_6 R6_3 R6_4 R6_5 R6_6 R7_3 R7_4 R7_5 R7_6 R8_3 R8_4 R8_5 R8_6 R9_2 R9_3 R9_4 R9_5 R10_2 R10_3 R10_4 R10_5 R11_2 R11_3 R11_4 R11_5 R12_2 R12_3 R12_4 R12_5 R13_2 R13_3 R13_4 R13_5 R14_1 R14_2 R14_3 R14_4 R15 R15_1 R15_2 R15_3: library part R1206
S1: library part B3F-10XX
SW1 SW1_1 SW1_2 SW1_3 SW2 SW2_1 SW2_2 SW2_3 SW3 SW3_1 SW3_2 SW3_3 SW4 SW4_1 SW4_2 SW4_3 SW5 SW5_1 SW5_2 SW5_3 SW6 SW6_1 SW6_2 SW6_3: library part CL-SB-12A
U1: library part DIP08-KIT
U2 U3: library part DIP08
U$1 U$2 U$3 U$4 U$5 U$6 U$23: library part PERFHOLE
U$1_1 U$1_2 U$1_3 U$1_4 U$2_1 U$2_2 U$2_3 U$2_4 U$3_1 U$3_2 U$3_3 U$3_4: library part COINCELL

## Free pads (board coordinates)
  round 187 hole 187: 1(34000,28475) 1(34000,30025) 1(34020,26550) 1(34020,28100) 1(34055,24585) 1(34055,26135) 1(35550,28475) 1(35550,30025) 1(35570,26550) 1(35570,28100) 1(35605,24585) 1(35605,26135) 1(35850,28475) 1(35850,30025) 1(35870,26550) 1(35870,28100) 1(35905,24585) 1(35905,26135) 1(37400,28475) 1(37400,30025) 1(37420,26550) 1(37420,28100) 1(37455,24585) 1(37455,26135) 1(37700,28475) 1(37700,30025) 1(37720,26550) 1(37720,28100) 1(37755,24585) 1(37755,26135) 1(39250,28475) 1(39250,30025) 1(39270,26550) 1(39270,28100) 1(39305,24585) 1(39305,26135) 1(39725,24565) 1(39725,26115) 1(39725,26415) 1(39725,27965) 1(39725,28265) 1(39725,29815) 1(41275,24565) 1(41275,26115) 1(41275,26415) 1(41275,27965) 1(41275,28265) 1(41275,29815)
  round 125 hole 125: 1(36360,24125) 1(36560,22075) 1(37660,22075) 1(38260,24075)
  round 86.61 hole 86.61: 1(38720.27,22078.42) 1(38725.27,23993.42) 1(39390.27,23998.42) 1(39420.27,22118.42) 1(41250.27,22248.42) 1(41260.27,23383.42)

## Via types
v1: diameter 41.59/41.59 (per signal layer), hole 25.59, Top Layer to Bottom Layer, 168 vias
v2: diameter 34/34 (per signal layer), hole 20, Top Layer to Bottom Layer, 25 vias
v3: diameter 53.15/66 (per signal layer), hole 35.43, Top Layer to Bottom Layer, 12 vias

## Nets (pads, with @x,y where several pads share a name; then routed paths per layer and width w, separated by ;. In a path a pad name is that pad's centre, name@x,y a point inside that pad or via, vN(x,y) a via of type N, cw(c..) or ccw(c..) an arc to the next point about the centre after c; other vN are vias at no path point)
pads on no net: 1.P$1 1.P$2 1.P$3 1_1.P$1 1_1.P$2 1_1.P$3 1_2.P$1 1_2.P$2 1_2.P$3 1_3.P$1 1_3.P$2 1_3.P$3 2.P$1 2.P$2 2.P$3 2_1.P$1 2_1.P$2 2_1.P$3 2_2.P$1 2_2.P$2 2_2.P$3 2_3.P$1 2_3.P$2 2_3.P$3 3.P$1 3.P$2 3.P$3 3_1.P$1 3_1.P$2 3_1.P$3 3_2.P$1 3_2.P$2 3_2.P$3 3_3.P$1 3_3.P$2 3_3.P$3 4.P$1 4.P$2 4.P$3 4_1.P$1 4_1.P$2 4_1.P$3 4_2.P$1 4_2.P$2 4_2.P$3 4_3.P$1 4_3.P$2 4_3.P$3 5.P$1 5.P$2 5.P$3 5_1.P$1 5_1.P$2 5_1.P$3 5_2.P$1 5_2.P$2 5_2.P$3 5_3.P$1 5_3.P$2 5_3.P$3 6.P$1 6.P$2 6.P$3 6_1.P$1 6_1.P$2 6_1.P$3 6_2.P$1 6_2.P$2 6_2.P$3 6_3.P$1 6_3.P$2 6_3.P$3 B1.3.3V B1.5V B1.A0 B1.A1 B1.A2 B1.A3 B1.A4 B1.A5 B1.AREF B1.D2 B1.D3 B1.D4 B1.D5 B1.D6 B1.D7 B1.D8 B1.D9 B1.D10 B1.D11 B1.D12 B1.D13 B1.GND@0 B1.GND@1 B1.GND@2 B1.IOREF B1.NC B1.RES B1.RX B1.SCL B1.SDA B1.TX B1.VIN BATTERY.1 BATTERY.2 C1.+ C1.- C1_1.1 C1_1.2 C1_2.1 C1_2.2 C1_3.1 C1_3.2 C1_4.1 C1_4.2 C1_5.1 C1_5.2 C2.1 C2.2 C2_1.1 C2_1.2 C2_2.1 C2_2.2 C2_3.1 C2_3.2 C2_4.1 C2_4.2 C2_5.1 C2_5.2 C3.1 C3.2 C3_1.1 C3_1.2 C3_2.+ C3_2.- C3_3.+ C3_3.- C3_4.+ C3_4.- C3_5.+ C3_5.- C4.1 C4.2 C4_1.1 C4_1.2 C4_2.+ C4_2.- C4_3.+ C4_3.- C4_4.+ C4_4.- C4_5.+ C4_5.- C5.1 C5.2 C5_1.1 C5_1.2 C5_2.1 C5_2.2 C5_3.1 C5_3.2 C5_4.1 C5_4.2 C5_5.1 C5_5.2 C6.1 C6.2 C6_1.1 C6_1.2 C6_2.1 C6_2.2 C6_3.1 C6_3.2 C6_4.1 C6_4.2 C7.1 C7.2 C7_1.+ C7_1.- C7_2.+ C7_2.- C7_3.+ C7_3.- C7_4.+ C7_4.- C8.1 C8.2 C8_1.+ C8_1.- C8_2.+ C8_2.- C8_3.+ C8_3.- C8_4.+ C8_4.- C9.1 C9.2 C9_1.1 C9_1.2 C9_2.1 C9_2.2 C9_3.1 C9_3.2 C9_4.1 C9_4.2 C10.1 C10.2 C10_1.1 C10_1.2 C10_2.1 C10_2.2 C10_3.1 C10_3.2 C10_4.1 C10_4.2 C11.1 C11.2 C11_1.+ C11_1.- C11_2.+ C11_2.- C11_3.+ C11_3.- C11_4.+ C11_4.- C12.1 C12.2 C12_1.+ C12_1.- C12_2.+ C12_2.- C12_3.+ C12_3.- C12_4.+ C12_4.- C13.1 C13.2 C14.1 C14.2 D1.A D1.C D1_1.A D1_1.C D1_2.A D1_2.C D1_3.A D1_3.C D2.A D2.C D2_1.A D2_1.C D2_2.A D2_2.C D2_3.A D2_3.C D3.A D3.C D3_1.A D3_1.C D3_2.A D3_2.C D3_3.A D3_3.C IC1.1 IC1.2 IC1.3 IC1.4 IC1.5 IC1.6 IC1.7 IC1.8 IC1_1.1 IC1_1.2 IC1_1.3 IC1_1.4 IC1_1.5 IC1_1.6 IC1_1.7 IC1_1.8 IC1_2.1 IC1_2.2 IC1_2.3 IC1_2.4 IC1_2.5 IC1_2.6 IC1_2.7 IC1_2.8 IC1_3.1 IC1_3.2 IC1_3.3 IC1_3.4 IC1_3.5 IC1_3.6 IC1_3.7 IC1_3.8 IC1_4.1 IC1_4.2 IC1_4.3 IC1_4.4 IC1_4.5 IC1_4.6 IC1_4.7 IC1_4.8 IC2.1 IC2.2 IC2.3 IC2.4 IC2.5 IC2.6 IC2.7 IC2.8 IC2_1.1 IC2_1.2 IC2_1.3 IC2_1.4 IC2_1.5 IC2_1.6 IC2_1.7 IC2_1.8 IC2_2.1 IC2_2.2 IC2_2.3 IC2_2.4 IC2_2.5 IC2_2.6 IC2_2.7 IC2_2.8 IC2_3.1 IC2_3.2 IC2_3.3 IC2_3.4 IC2_3.5 IC2_3.6 IC2_3.7 IC2_3.8 IC3.1 IC3.2 IC3.3 IC3.4 IC3.5 IC3.6 IC3.7 IC3.8 IC3_1.1 IC3_1.2 IC3_1.3 IC3_1.4 IC3_1.5 IC3_1.6 IC3_1.7 IC3_1.8 IC3_2.1 IC3_2.2 IC3_2.3 IC3_2.4 IC3_2.5 IC3_2.6 IC3_2.7 IC3_2.8 IC3_3.1 IC3_3.2 IC3_3.3 IC3_3.4 IC3_3.5 IC3_3.6 IC3_3.7 IC3_3.8 IR1.1 IR1.2 IR2.1 IR2.2 IRDISTANCE_FRONT.1 IRDISTANCE_FRONT.2 IRDISTANCE_FRONT.3 IRDISTANCE_LEFT.1 IRDISTANCE_LEFT.2 IRDISTANCE_LEFT.3 IRDISTANCE_RIGHT.1 IRDISTANCE_RIGHT.2 IRDISTANCE_RIGHT.3 J1.1 J1.2 J1_1.1 J1_1.2 J1_1.3 J1_1.4 J1_1.5 J1_1.6 J1_1.7 J1_1.8 J1_2.1 J1_2.2 J1_3.1 J1_3.2 J1_4.1 J1_4.2 J1_5.1 J1_5.2 J2.1 J2.2 J2.3 J2_1.1 J2_1.2 J2_1.3 J2_1.4 J2_1.5 J2_1.6 J2_1.7 J2_1.8 J2_2.1 J2_2.2 J2_3.1 J2_3.2 J2_4.1 J2_4.2 J2_5.1 J2_5.2 J3.1 J3.2 J3.3 J3_1.1 J3_1.2 J3_2.1 J3_2.2 J3_3.1 J3_3.2 J3_4.1 J3_4.2 J4.1 J4.2 J4.3 J4_1.1 J4_1.2 J4_2.1 J4_2.2 J4_3.1 J4_3.2 J4_4.1 J4_4.2 J5.1 J5.2 J5.3 J5_1.1 J5_1.2 J5_2.1 J5_2.2 J5_3.1 J5_3.2 J5_4.1 J5_4.2 J6.1 J6.2 J6.3 J6.4 J6.5 J6.6 J6.7 J6.8 J6.9 J6.10 J6_1.1 J6_1.2 J6_2.1 J6_2.2 J6_3.1 J6_3.2 J6_4.1 J6_4.2 J7.1 J7.2 J8.1 J8.2 J9.1 J9.2 J9.3 J10.1 J10.2 J10.3 J11.1 J11.2 J11.3 J12.1 J12.2 J12.3 JP1.1 JP1.2 JP1.3 JP2.1 JP2.2 JP2.3 JP2.4 JP2.5 JP2.6 JP2.7 JP2.8 JP3.1 JP3.2 JP3.3 JP3.4 JP3.5 JP3.6 JP3.7 JP3.8 JP4.1 JP4.2 JP4.3 JP4.4 JP4.5 JP4.6 JP4.7 JP4.8 JP5.1 JP5.2 JP5.3 JP5.4 JP5.5 JP5.6 JP5.7 JP5.8 JP6.1 JP6.2 JP6.3 JP6.4 JP6.5 JP6.6 JP7.1 JP7.2 JP7.3 JP7.4 JP7.5 JP7.6 JP8.1 JP8.2 JP8.3 JP8.4 JP8.5 JP8.6 JP9.1 JP9.2 JP9.3 JP9.4 JP9.5 JP9.6 JP10.1 JP10.2 JP10.3 JP11.1 JP11.2 JP11.3 JP12.1 JP12.2 JP12.3 LED1.P$1 LED1.P$2 LED1_1.P$1 LED1_1.P$2 LED1_2.P$1 LED1_2.P$2 LED1_3.P$1 LED1_3.P$2 LED2.P$1 LED2.P$2 LED2_1.P$1 LED2_1.P$2 LED2_2.P$1 LED2_2.P$2 LED2_3.P$1 LED2_3.P$2 LED3.P$1 LED3.P$2 LED3_1.P$1 LED3_1.P$2 LED3_2.P$1 LED3_2.P$2 LED3_3.P$1 LED3_3.P$2 LED4.P$1 LED4.P$2 LED4_1.P$1 LED4_1.P$2 LED4_2.P$1 LED4_2.P$2 LED4_3.P$1 LED4_3.P$2 LED5.P$1 LED5.P$2 LED5_1.P$1 LED5_1.P$2 LED5_2.P$1 LED5_2.P$2 LED5_3.P$1 LED5_3.P$2 LED6.P$1 LED6.P$2 LED6_1.P$1 LED6_1.P$2 LED6_2.P$1 LED6_2.P$2 LED6_3.P$1 LED6_3.P$2 LED7.P$1 LED7.P$2 LED7_1.P$1 LED7_1.P$2 LED7_2.P$1 LED7_2.P$2 LED7_3.P$1 LED7_3.P$2 LED8.P$1 LED8.P$2 LED8_1.P$1 LED8_1.P$2 LED8_2.P$1 LED8_2.P$2 LED8_3.P$1 LED8_3.P$2 LED9.P$1 LED9.P$2 LED9_1.P$1 LED9_1.P$2 LED9_2.P$1 LED9_2.P$2 LED9_3.P$1 LED9_3.P$2 LUX1.P$1 LUX1.P$2 LUX1.P$3 LUX1_1.P$1 LUX1_1.P$2 LUX1_1.P$3 LUX1_2.P$1 LUX1_2.P$2 LUX1_2.P$3 LUX1_3.P$1 LUX1_3.P$2 LUX1_3.P$3 LUX2.P$1 LUX2.P$2 LUX2.P$3 LUX2_1.P$1 LUX2_1.P$2 LUX2_1.P$3 LUX2_2.P$1 LUX2_2.P$2 LUX2_2.P$3 LUX2_3.P$1 LUX2_3.P$2 LUX2_3.P$3 LUX.P$1 LUX.P$2 LUX.P$3 LUX_1.P$1 LUX_1.P$2 LUX_1.P$3 LUX_2.P$1 LUX_2.P$2 LUX_2.P$3 LUX_3.P$1 LUX_3.P$2 LUX_3.P$3 MIC.1 MIC.2 MIC.3 MICROPHONE.1 MICROPHONE.2 MICROPHONE.3 PWR1.P$1 PWR1.P$2 PWR1_1.P$1 PWR1_1.P$2 PWR1_2.P$1 PWR1_2.P$2 PWR1_3.P$1 PWR1_3.P$2 PWR2.P$1 PWR2.P$2 PWR2_1.P$1 PWR2_1.P$2 PWR2_2.P$1 PWR2_2.P$2 PWR2_3.P$1 PWR2_3.P$2 PWR.P$1 PWR.P$2 PWR_1.P$1 PWR_1.P$2 PWR_2.P$1 PWR_2.P$2 PWR_3.P$1 PWR_3.P$2 R1.1 R1.2 R1_1.P$1 R1_1.P$2 R1_2.1 R1_2.2 R1_3.1 R1_3.2 R1_4.1 R1_4.2 R1_5.1 R1_5.2 R1_6.1 R1_6.2 R2.1 R2.2 R2_1.P$1 R2_1.P$2 R2_2.1 R2_2.2 R2_3.1 R2_3.2 R2_4.1 R2_4.2 R2_5.1 R2_5.2 R2_6.1 R2_6.2 R3.1 R3.2 R3_1.P$1 R3_1.P$2 R3_2.1 R3_2.2 R3_3.1 R3_3.2 R3_4.1 R3_4.2 R3_5.1 R3_5.2 R3_6.1 R3_6.2 R4.1 R4.2 R4_1.P$1 R4_1.P$2 R4_2.1 R4_2.2 R4_3.1 R4_3.2 R4_4.1 R4_4.2 R4_5.1 R4_5.2 R4_6.1 R4_6.2 R5.1 R5.2 R5_1.P$1 R5_1.P$2 R5_2.1 R5_2.2 R5_3.1 R5_3.2 R5_4.1 R5_4.2 R5_5.1 R5_5.2 R5_6.1 R5_6.2 R6.1 R6.2 R6_1.P$1 R6_1.P$2 R6_2.1 R6_2.2 R6_3.1 R6_3.2 R6_4.1 R6_4.2 R6_5.1 R6_5.2 R6_6.1 R6_6.2 R7.1 R7.2 R7_1.P$1 R7_1.P$2 R7_2.1 R7_2.2 R7_3.1 R7_3.2 R7_4.1 R7_4.2 R7_5.1 R7_5.2 R7_6.1 R7_6.2 R8.1 R8.2 R8_1.P$1 R8_1.P$2 R8_2.1 R8_2.2 R8_3.1 R8_3.2 R8_4.1 R8_4.2 R8_5.1 R8_5.2 R8_6.1 R8_6.2 R9.1 R9.2 R9_1.P$1 R9_1.P$2 R9_2.1 R9_2.2 R9_3.1 R9_3.2 R9_4.1 R9_4.2 R9_5.1 R9_5.2 R10.1 R10.2 R10_1.P$1 R10_1.P$2 R10_2.1 R10_2.2 R10_3.1 R10_3.2 R10_4.1 R10_4.2 R10_5.1 R10_5.2 R11.1 R11.2 R11_1.P$1 R11_1.P$2 R11_2.1 R11_2.2 R11_3.1 R11_3.2 R11_4.1 R11_4.2 R11_5.1 R11_5.2 R12.1 R12.2 R12_1.P$1 R12_1.P$2 R12_2.1 R12_2.2 R12_3.1 R12_3.2 R12_4.1 R12_4.2 R12_5.1 R12_5.2 R13.1 R13.2 R13_1.P$1 R13_1.P$2 R13_2.1 R13_2.2 R13_3.1 R13_3.2 R13_4.1 R13_4.2 R13_5.1 R13_5.2 R14.P$1 R14.P$2 R14_1.1 R14_1.2 R14_2.1 R14_2.2 R14_3.1 R14_3.2 R14_4.1 R14_4.2 R15.1 R15.2 R15_1.1 R15_1.2 R15_2.1 R15_2.2 R15_3.1 R15_3.2 S1.1 S1.2 S1.3 S1.4 SERVO_LEFT.1 SERVO_LEFT.2 SERVO_LEFT.3 SERVO_RIGHT.1 SERVO_RIGHT.2 SERVO_RIGHT.3 SW1.1 SW1.2 SW1.3 SW1_1.1 SW1_1.2 SW1_1.3 SW1_2.1 SW1_2.2 SW1_2.3 SW1_3.1 SW1_3.2 SW1_3.3 SW2.1 SW2.2 SW2.3 SW2_1.1 SW2_1.2 SW2_1.3 SW2_2.1 SW2_2.2 SW2_2.3 SW2_3.1 SW2_3.2 SW2_3.3 SW3.1 SW3.2 SW3.3 SW3_1.1 SW3_1.2 SW3_1.3 SW3_2.1 SW3_2.2 SW3_2.3 SW3_3.1 SW3_3.2 SW3_3.3 SW4.1 SW4.2 SW4.3 SW4_1.1 SW4_1.2 SW4_1.3 SW4_2.1 SW4_2.2 SW4_2.3 SW4_3.1 SW4_3.2 SW4_3.3 SW5.1 SW5.2 SW5.3 SW5_1.1 SW5_1.2 SW5_1.3 SW5_2.1 SW5_2.2 SW5_2.3 SW5_3.1 SW5_3.2 SW5_3.3 SW6.1 SW6.2 SW6.3 SW6_1.1 SW6_1.2 SW6_1.3 SW6_2.1 SW6_2.2 SW6_2.3 SW6_3.1 SW6_3.2 SW6_3.3 TREASURE_LEFT.1 TREASURE_LEFT.2 TREASURE_LEFT.3 TREASURE_RIGHT.1 TREASURE_RIGHT.2 TREASURE_RIGHT.3 U1.1 U1.2 U1.3 U1.4 U1.5 U1.6 U1.7 U1.8 U2.1 U2.2 U2.3 U2.4 U2.5 U2.6 U2.7 U2.8 U3.1 U3.2 U3.3 U3.4 U3.5 U3.6 U3.7 U3.8 U$1.P$1 U$1_1.+@1 U$1_1.+@2 U$1_1.- U$1_2.+@1 U$1_2.+@2 U$1_2.- U$1_3.+@1 U$1_3.+@2 U$1_3.- U$1_4.+@1 U$1_4.+@2 U$1_4.- U$2.P$1 U$2_1.+@1 U$2_1.+@2 U$2_1.- U$2_2.+@1 U$2_2.+@2 U$2_2.- U$2_3.+@1 U$2_3.+@2 U$2_3.- U$2_4.+@1 U$2_4.+@2 U$2_4.- U$3.P$1 U$3_1.+@1 U$3_1.+@2 U$3_1.- U$3_2.+@1 U$3_2.+@2 U$3_2.- U$3_3.+@1 U$3_3.+@2 U$3_3.- U$3_4.+@1 U$3_4.+@2 U$3_4.- U$4.P$1 U$5.P$1 U$6.P$1 U$23.P$1